# Altium PCB DaughterBoard.PcbDoc
Units mil, origin at the board's own origin, x right, y up, seen from the top; angles counter-clockwise.
Board outline 868.14 x 1545.28 mil, 2 copper layers (Top, Bottom), stack 65.748 mil thick; 24 components, 20 nets, 97 pads, 10 vias.
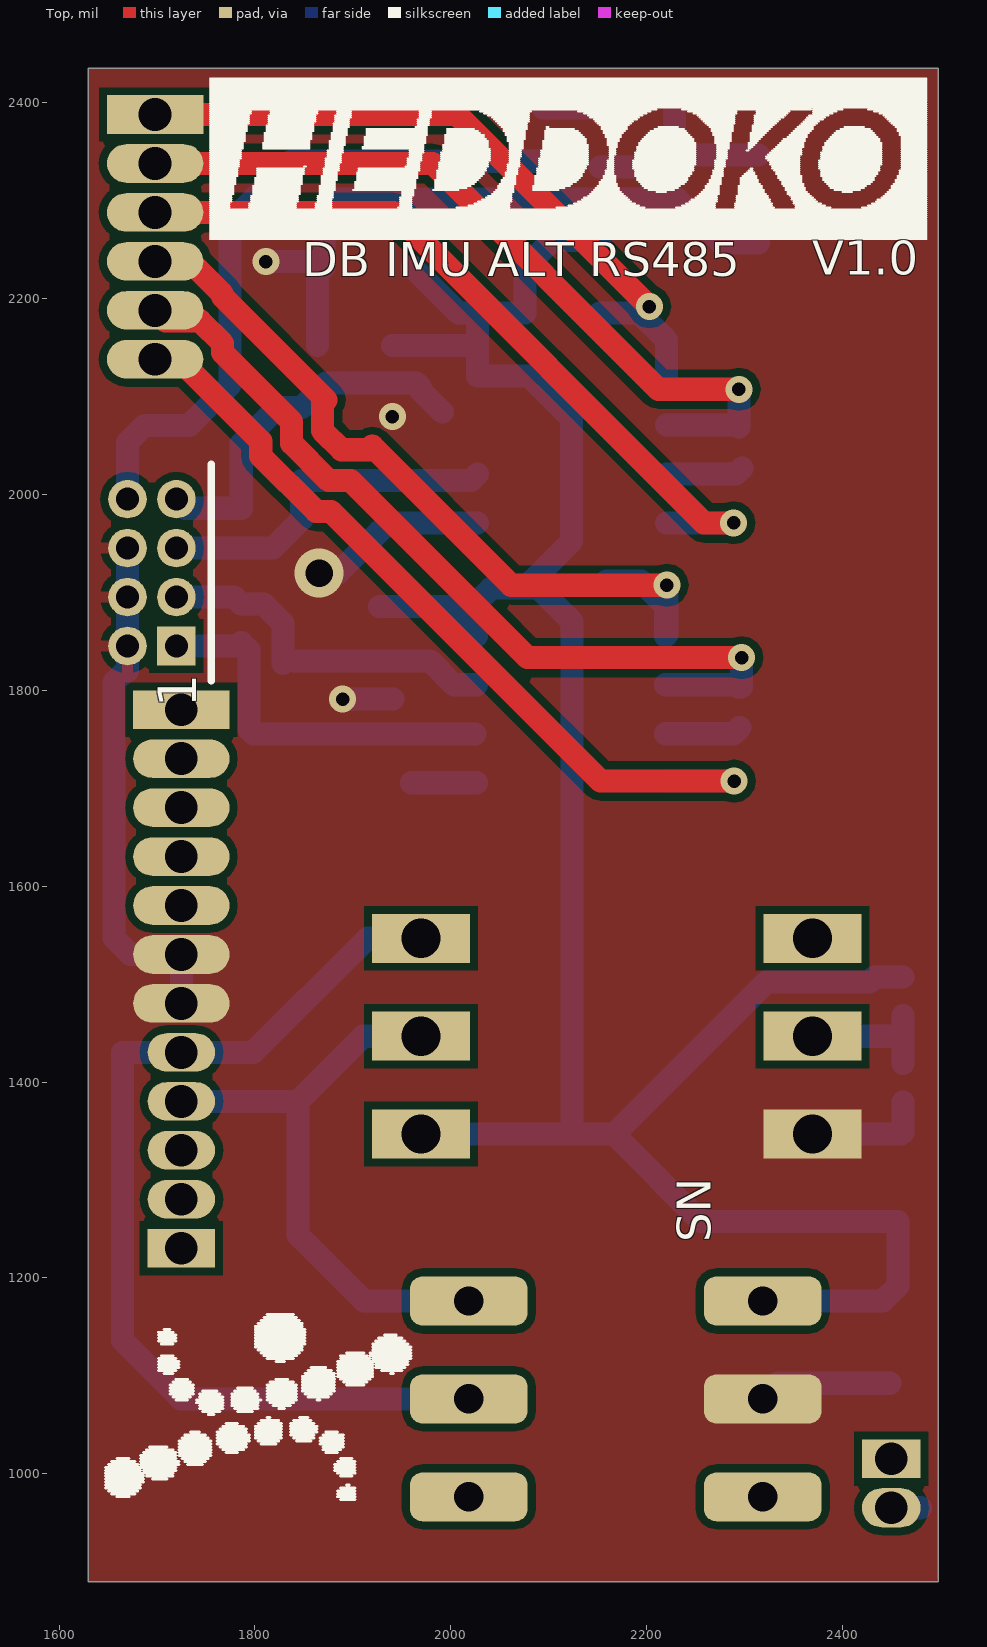
[diagram p0: Top view]
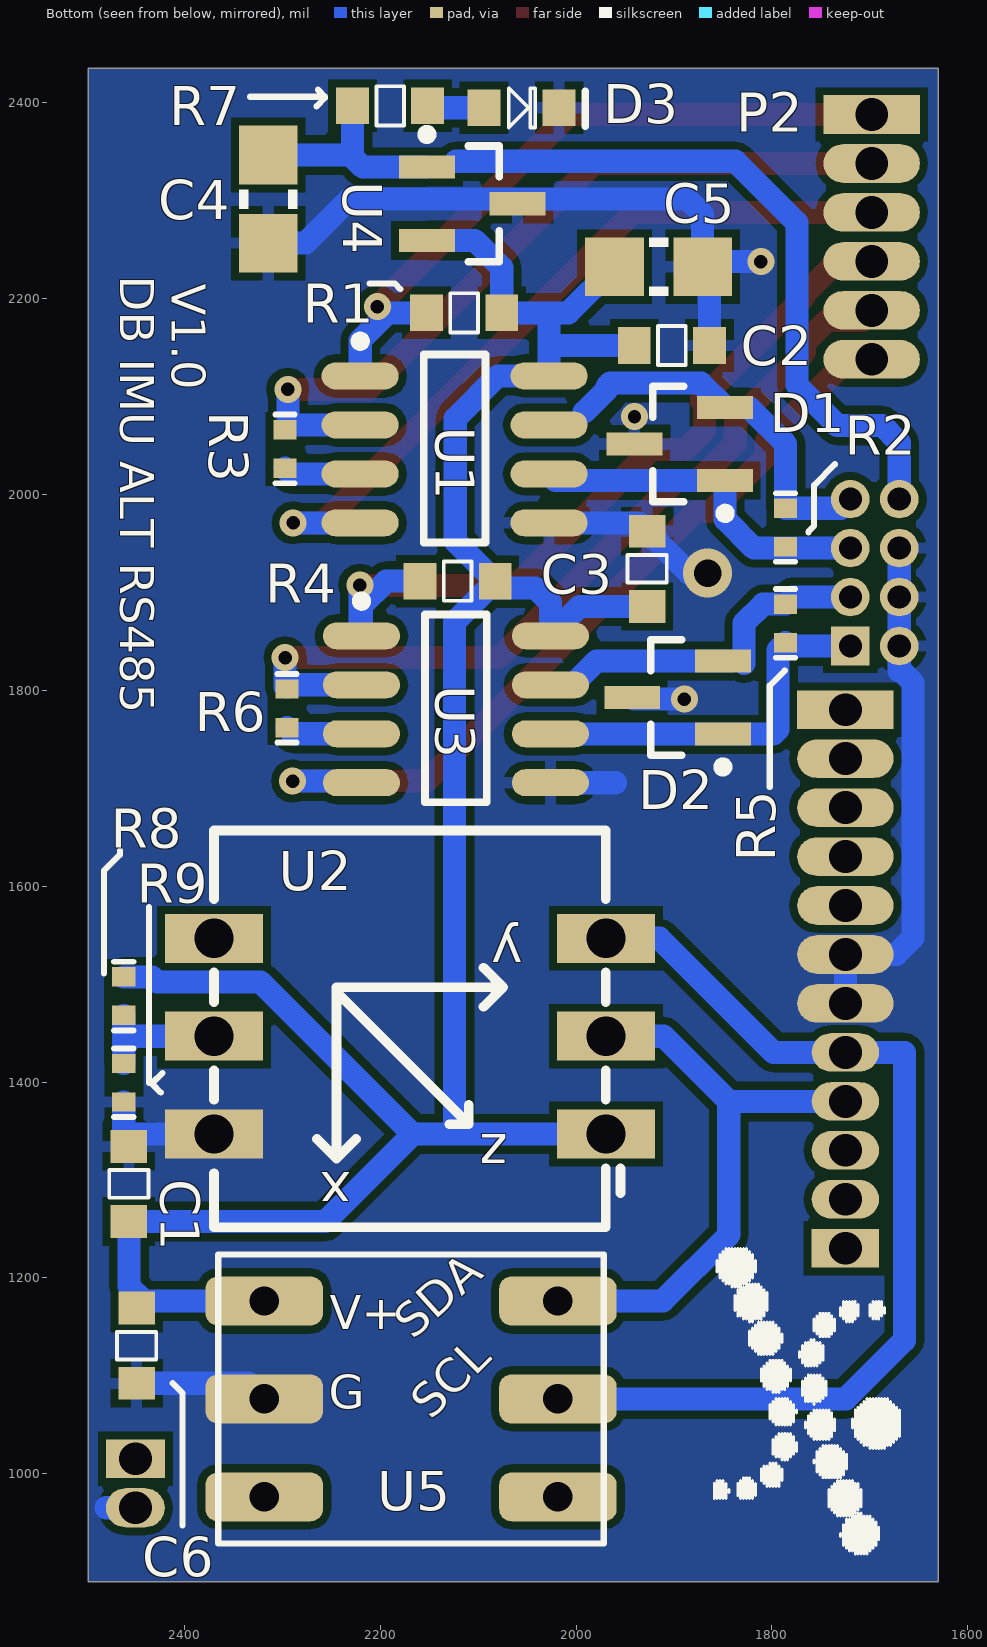
[diagram p1: Bottom view, seen from below]

## Layer stack, top to bottom
Top Solder: solder mask 0.4, Solder Resist, Dk 3.5
Top: signal copper 1.378
Dielectric1: core 62.9921, FR-4, Dk 4.58
Bottom: signal copper 1.378
Bottom Solder: solder mask 0.4, Solder Resist, Dk 3.5

## Board outline
1629.92,889.76 1629.92,2435.04 2498.06,2435.04 2498.06,889.76

## Design rules (kind name [scope] priority, off if disabled: settings)
AssemblyTestPointUsage [All] p1 off:
AssemblyTestpoint [All] p1 off: testpointundercomponent=TRUE minsize=40 maxsize=100 preferedsize=60 minholesize=0 maxholesize=40 preferedholesize=32 testpointgrid=1 usegrid=TRUE gridtolerance=0.01 allowsidetop=TRUE allowsidebottom=TRUE
Clearance ClearanceViaPad [IsVia vs IsPad] p1: gap=3.94
Clearance ClearanceGNDpolygons [InPolygonClass('GNDpolygons')] p2: gap=11.81
Clearance ClearanceTechnology [All] p3: gap=7.87
FabricationTestPointUsage [All] p1 off: valid=0 allowmultiple=FALSE
FabricationTestpoint [All] p1 off: side=3 testpointundercomponent=TRUE minsize=40 maxsize=100 preferedsize=60 minholesize=0 maxholesize=40 preferedholesize=32 testpointgrid=1 allowsidetop=TRUE allowsidebottom=TRUE usegrid=TRUE gridtolerance=0.01
HoleSize [All] p1: absolutevalues=TRUE maxlimit=248.03 minlimit=11.81 maxpercent=80.000 minpercent=20.000
HoleToHoleClearance [All] p1: gap=11.81 allowstackedmicrovias=TRUE
MinimumAnnularRing [All] p1: minimumring=7.87
MinimumSolderMaskSliver [All] p1: minsoldermaskwidth=3.94
PlaneClearance [All] p1: clearance=9.84
PolygonConnect PolygonConnectVia [IsVia] p1: connectstyle=Direct reliefconductorwidth=15.75 reliefentries=4 polygonreliefangle="90 Angle" airgapwidth=10
PolygonConnect PolygonConnectBigPads [(ObjectKind = 'Pad') And ((AsMM(PadXSize_AllLayers) > 2) Or (AsMM(PadYSize_AllLayers) > 2))] p2: connectstyle=Direct reliefconductorwidth=15.75 reliefentries=4 polygonreliefangle="90 Angle" airgapwidth=10
PolygonConnect PolygonConnectGeneral [All] p3: connectstyle=Relief reliefconductorwidth=11.81 reliefentries=4 polygonreliefangle="90 Angle" airgapwidth=7.87
RoutingVias [All] p1: holewidth=23.62 width=47.24 viastyle="Through Hole" minholewidth=11.81 minwidth=27.56 maxholewidth=35.43 maxwidth=55.12
SilkToSilkClearance [All] p1: silktosilkclearance=5.91
SilkToSolderMaskClearance SilkscreenOverComponentPads [IsPad] p1: minsilkscreentomaskgap=3.94 clearancetoexposedcopper=FALSE
SolderMaskExpansion [All] p1: expansion=3.94
Width WidthTechnology [All] p1: maxlimit=118.11 minlimit=6.3 preferedwidth=23.62
20 further rules are at their usual default settings.

## Components (designator, comment, footprint, x,y, rotation, side; value= is the part's Value field where it differs from the comment)
C1 "Cap" 0603 2456.48,1295.2 r270 bottom
C2 "Cap" 0603 1902.84,2151.97 r0 bottom
C3 "Cap" 0603 1927.32,1923.38 r270 bottom
C4 "" SMD0805 2314.31,2301.62 r180 bottom
C5 "" SMD0805 1915.71,2232.51 r90 bottom
C6 "Cap" 0603 2448.78,1131.39 r90 bottom
D1 "TVS Diode (2 Channel)" SOT23-3 1894.07,2051.56 r0 bottom
D2 "TVS Diode (2 Channel)" SOT23-3 1896.32,1792.62 r0 bottom
D3 "LED2_1" LED0603 2055.68,2394.86 r180 bottom
P2 "Header 6_SMD" "Header 6 1.27mm" 1698.09,2387.97 r180 bottom
R1 "" 0603 2113.64,2185.59 r180 bottom
R2 "" 0402 1786.12,1966.18 r90 bottom
R3 "" 0402 2297.26,2046.49 r90 bottom
R4 "" 0603 2120.21,1911.6 r180 bottom
R5 "" 0402 1786.12,1868.33 r90 bottom
R6 "" 0402 2295.13,1781.55 r90 bottom
R7 "" 0603 2190.63,2396.65 r0 bottom
R8 "" 0402 2461.94,1487.73 r90 bottom
R9 "" 0402 2461.85,1399.27 r90 bottom
U1 "RS485_Tranceiver" SOIC8 2220.44,2120.99 r180 bottom
U2 "EM7180SFP" EM7180SFP 1969.58,1346.79 r0 bottom
U3 "RS485_Tranceiver" SOIC8 2219.15,1855.61 r180 bottom
U4 "AP7333" SOT23-3 2106.06,2296.79 r180 bottom
U5 "PRESSURE SENSOR" NPA-201 2168.51,1076.4 r180 bottom

## Footprints (in the part's own frame and the unit in brackets; to place one, negate y for a bottom-side part, rotate by r counter-clockwise, add the part's x,y. Pads: shape width x height; smd on the part's side, far side on the other; paste and mask are expansions set on the pad)
0402 [mm]
  rect 0.5x0.6 smd: 1(-0.5,0) 2(0.5,0)
  silkscreen extent -0.89,-0.25 0.89,0.25
0603 [mm] "SMT  0603"
  rect 0.85x0.95 smd: 1(-0.992,-0.003) 2(0.958,-0.003)
  silkscreen extent -0.38,-0.51 0.34,0.5, body extent -0.89,-0.43 0.86,0.42, height 1
EM7180SFP [mil] "EM Micro IMU"
  rect 100x50 hole 40: 1(0,0) 2(0,-100) 3(0,-200) 4(400,-200) 5(400,-100) 6(400,0)
  silkscreen extent -15,-310 400,95, body extent -2,-315 405,100, height 79
"Header 6 1.27mm" [mm] "SIP Header 1.27mm 6 pins"
  rect 2.5x1 hole 0.85: 1(0,0)
  oval 2.5x1 hole 0.85: 2(0,-1.27) 3(0,-2.54) 4(0,-3.81) 5(0,-5.08) 6(0,-6.35)
  body extent -1.15,-7.15 1.06,0.85, height 6
LED0603 [mm] "SMT LED 0603"
  rect 0.85x0.95 smd: 1(-0.975,0) 2(0.975,0)
  silkscreen extent -0.33,-0.51 1.65,0.51, body extent -0.87,-0.43 0.87,0.43, height 1
NPA-201 [mil] "PRESSURE SENSOR MODULE"
  rrect50% 120x50 hole 30: 0(-150,-100) 0(150,-100) 1(-150,100) 2(-150,0) 3(150,0) 4(150,100)
  silkscreen extent -197,-148 197,148
SMD0805 [mil]
  rect 60x60 smd: 1(0,45) 2(0,-45)
  silkscreen extent -30,-10 30,10, body extent -29,-43 29,43, height 43
SOIC8 [mm]
  oval 2x0.7 smd: 1(0,0) 2(0,-1.27) 3(0,-2.54) 4(0,-3.81) 5(4.9,-3.81) 6(4.9,-2.54) 7(4.9,-1.27) 8(4.9,0)
  silkscreen extent -0.13,-4.32 3.25,1.02, body extent 0.45,-4.57 4.45,0.56, height 1.91
SOT23-3 [mm] "SOT23-3 MEDIUM DENSITY"
  rect 1.45x0.6 smd: 1(-1.175,0.95) 2(-1.175,-0.95) 3(1.175,0)
  silkscreen extent -1.3,-1.5 0.7,1.92, body extent -0.7,-1.5 0.7,1.5, height 1.1

## Part data
C1 C2 C3 C6: "Capacitor"
C4 C5: library part A01-0492
D3: "Typical RED, GREEN, YELLOW, AMBER GaAs LED"
P2: "Header, 6-Pin SMD"
R1 R2 R3 R4 R5 R6 R7 R8 R9: library part Res3, "Resistor"
U4: "3.3 V regulator"
U5: library part NPA-201, "NPA-201-EV"

## Free pads (board coordinates)
  round 39.37 hole 23.62: 1(1669.92,1995.24) 2(1719.92,1995.24) 3(1669.92,1945.24) 4(1719.92,1945.24) 5(1669.92,1895.24) 6(1719.92,1895.24) 7(1669.92,1845.24)
  rect 39.37x39.37 hole 23.62: 8(1719.92,1845.24)
  rect 98.43x39.37 hole 33.46: 9(1724.92,1780.24)
  oval 98.43x39.37 hole 33.46: 10(1724.92,1730.24) 11(1724.92,1680.24) 12(1724.92,1630.24) 13(1724.92,1580.24) 14(1724.92,1530.24) 15(1724.92,1480.24)
  oval 68.9x39.37 hole 33.46: 16(1724.92,1430.24) 17(1724.92,1380.24) 18(1724.92,1330.24) 19(1724.92,1280.24)
  rect 68.9x39.37 hole 33.46: 20(1724.92,1230.24)
  rect 60x39.37 hole 33.46: 21(2449.92,1015.24)
  oval 60x40 hole 33.46: 22(2449.92,965.24)

## Via types
v1: diameter 27.56, hole 13.78, Top to Bottom, 9 vias
v2: diameter 50, hole 28, Top to Bottom, 1 vias

## Nets (pads, with @x,y where several pads share a name; then routed paths per layer and width w, separated by ;. In a path a pad name is that pad's centre, name@x,y a point inside that pad or via, vN(x,y) a via of type N, cw(c..) or ccw(c..) an arc to the next point about the centre after c; other vN are vias at no path point)
D_EN0: R6.1 U3.3 | length 78.6
  Bottom w23.62: U3.3 2288.87,1755.61 R6.1
D_EN1: R3.1 U1.3 | length 79.2
  Bottom w23.62: U1.3 2291.43,2020.99 R3.1
GND: C1.1 C2.1 C3.1 C4.2 C5.2 C6.1 D1.3 D2.3 D3.2 pad.3 pad.5 pad.7 pad.14 pad.15 pad.22 R9.1 U1.5 U2.6 U3.5 U4.3 U5.2 | length 1782.7
  Bottom w23.62: pad.3 pad.5 pad.7 1669.92,1819.61 1667.56,1819.61 1656.02,1808.07 1656.02,1547.12 1672.91,1530.24 pad.14 pad.15 ; v1(1811.34,2237.74) C5.2@1865.48,2237.74 ; C2.1 1863.79,2225.59 C5.2 1870.71,2286.28 1886.05,2301.62 2231.45,2301.62 2276.45,2256.62 C4.2 ; v2(1865.65,1919.59) 1884.6,1919.59 C3.1 1936,1970.99 U1.5 ; v1(1889.49,1791.1) D2.3@1941.06,1791.1 ; 1959.78,1705.61 U3.5 ; U5.2 2334.44,1092.33 C6.1 ; U2.6 2459.94,1346.79 2461.85,1348.7 R9.1 ; pad.22 pad.22@2479.8,965.24
  other v1: 1940.33,2079.44
NetD3_1: D3.1 R7.1 | length 55.6
  Bottom w23.62: D3.1 R7.1@2149.64,2394.86
R_EN0: P2.5 R6.2 U3.2 | length 869.5
  Top w23.62: P2.5 1708.72,2177.34 1743.92,2177.34 1766.98,2154.28 1766.98,2144.79 1837.47,2074.3 1837.47,2052.17 1875.53,2014.11 1897.66,2014.11 2078.44,1833.33 v1(2297.09,1833.33)
  Bottom w23.62: U3.2 2290.76,1805.61 R6.2@2293.13,1803.24 ; R6.2@2297.09,1803.2 v1(2297.09,1833.33)
R_EN1: P2.2 R3.2 U1.2 | length 804.7
  Top w23.62: P2.2 1981.46,2337.97 2212.03,2107.4 v1(2294.31,2107.4)
  Bottom w23.62: U1.2 2292.45,2070.99 2294.31,2069.13 v1(2294.31,2107.4)
RS485_A0: D2.1 pad.8 R5.1 U3.6 | length 388.6
  Bottom w23.62: pad.8 R5.1@1782.72,1845.24 ; R5.1 1793.82,1840.95 1793.82,1760.1 1798.7,1755.22 D2.1 ; D2.1@1848.88,1755.22 U3.6@2024.66,1755.22
RS485_A1: D1.1 pad.4 R2.1 U1.6 | length 362.1
  Bottom w23.62: pad.4 1818.41,1945.24 1847.81,1974.63 D1.1 2020.69,2014.15 U1.6
RS485_B0: D2.2 pad.6 R5.2 U3.7 | length 356.7
  Bottom w23.62: pad.6 1778.9,1895.24 R5.2 1809,1888.01 1828.57,1868.45 D2.2@1828.57,1827.29 ; D2.2@1840.57,1830.02 1978.91,1830.02 2003.32,1805.61 U3.7
RS485_B1: D1.2 pad.2 R2.2 U1.7 | length 381.2
  Bottom w23.62: pad.2 1729.29,1985.86 R2.2 1786.12,2051.56 1823.53,2088.96 D1.2 1872.57,2113.72 1965.1,2113.72 1968.47,2110.35 1968.47,2107.13 1991.57,2084.02
RXD0: P2.4 R4.1 U3.1 | length 840.8
  Top w23.62: P2.4 1733.29,2237.97 1766.98,2204.28 1766.98,2202.09 1872.55,2096.52 1868.97,2092.93 1868.97,2065.21 1888.57,2045.61 1916.29,2045.61 1919.88,2049.19 2061.75,1907.32 v1(2220.81,1907.32)
  Bottom w23.62: R4.1 2194.02,1911.47 2219.15,1886.34 U3.1 2220.81,1857.27 v1(2220.81,1907.32)
RXD1: P2.1 R1.1 U1.1 | length 701.8
  Top w23.62: P2.1 2006.74,2387.97 v1(2202.94,2191.78)
  Bottom w23.62: R1.1 2192.23,2185.46 2220.44,2157.25 U1.1
SA0: R8.1 R9.2 U2.5 | length 139.4
  Bottom w23.62: U2.5 2459.94,1446.79 ; R9.2@2461.94,1419.05 R8.1
SCL: pad.16 U2.3 U5.3 | length 1025.8
  Bottom w23.62: U2.3 1915.05,1546.79 1798.5,1430.24 pad.16 1664.67,1430.24 1664.67,1136.22 1724.49,1076.4 U5.3
SDA: pad.17 U2.2 U5.4 | length 611
  Bottom w23.62: pad.17 1844.13,1380.24 ; U2.2 1910.68,1446.79 1844.13,1380.24 ; U5.4 1911.41,1176.4 1844.13,1243.67 1844.13,1380.24
SW1_INT: U2.4
TXD0: P2.6 U3.4 | length 847
  Top w23.62: P2.6 1722.27,2137.97 1805.98,2054.27 1805.98,2039.12 1862.48,1982.62 1877.63,1982.62 2152.97,1707.27 v1(2289.33,1707.27)
  Bottom w23.62: U3.4@2220.81,1707.27 v1(2289.33,1707.27)
TXD1: P2.3 U1.4 | length 790.5
  Top w23.62: P2.3 1941.57,2287.97 2258.55,1970.99 v1(2288.87,1970.99)
  Bottom w23.62: U1.4 v1(2288.87,1970.99)
VCC: C1.2 C2.2 C3.2 C5.1 C6.2 R1.2 R4.2 R8.2 U1.8 U2.1 U3.8 U4.2 U5.1 | length 2589.7
  Bottom w23.62: C3.2 1996.19,1885.67 U3.8 2026.24,1889.4 2041.27,1904.44 R4.2@2087.55,1904.44 ; C2.2 2023.21,2152.1 ; C5.1 2007.76,2185.46 2025.11,2185.46 ; U2.1 2166.74,1346.79 ; 2123.98,1361.19 2123.98,1869.98 R4.2 2123.35,1952.33 2123.35,2077.39 2079.76,2120.99 U1.8 2027.52,2183.05 2025.11,2185.46 ; U4.2 2103.69,2259.39 2075.92,2231.61 R1.2 2025.11,2185.46 ; U5.1 2441.35,1176.4 2456.62,1191.67 C1.2 2256.05,1257.48 2166.74,1346.79 ; R8.2 2433.05,1507.42 2427.74,1502.1 2322.06,1502.1 2166.74,1346.79
VIN: C4.1 pad.1 R7.2 U4.1 | length 945.6
  Bottom w23.62: pad.1 1669.92,2052.87 1687.54,2070.48 1733.23,2070.48 1774.44,2111.7 1774.44,2277.42 1837.31,2340.29 2122.7,2340.29 ; U4.1 2217.72,2334.19 2228.35,2344.82 ; R7.2 2228.35,2344.82 ; C4.1 2230.15,2346.62 2228.35,2344.82
pads on no net: U5.0

## Polygon pours and split planes (outlines as drawn)
GND on Bottom "Bottom Layer-No Net" (solid, remove dead copper, pour order 2): 1629.92,2435.04 2498.06,2435.04 2498.06,889.76 1629.92,889.76
GND on Top "Bottom Layer-No Net" (solid, remove dead copper, pour order 2): 2498.06,2435.04 1629.92,2435.04 1629.92,889.76 2498.06,889.76

## Silkscreen, mask and mechanical layers (free items; w line width, h text height)
Top Overlay:
  drawing of 845 lines, arcs and shapes, not listed
  text "V1.0" at 2369.35,2213.14 h59.06
  text "DB IMU ALT RS485" at 1848.22,2211.77 h59.06
  text "1" at 1739.92,1782.24 h39.37 r90
  text "SN" at 2276.68,1236.21 h59.06 r90
Bottom Overlay:
  drawing of 214 lines, arcs and shapes, not listed
  text "DB IMU ALT RS485" at 2476.62,2223.3 h59.06 r90
  text "V1.0" at 2424.05,2215.32 h59.06 r90
Outline:
  the board outline again, w10

## Text inside footprints (layer, text, board x,y; h text height)
U2: Bottom Overlay "z" at 2069.58,1346.79 h39.37 r180; Bottom Overlay "y" at 2054.58,1551.79 h39.37 r180; Bottom Overlay "x" at 2229.58,1307.68 h39.37 r180
U5: Bottom Overlay "V+" at 2251.43,1136.46 h59.06; Bottom Overlay "G" at 2252.79,1054.95 h59.06; Bottom Overlay "SCL" at 2140.38,1046.12 h59.06 r315; Bottom Overlay "SDA" at 2159.05,1127.63 h59.06 r318